# Altium PCB Board Assembly.PcbDoc (part 3 of 3)
Units mil, origin at the board's own origin, x right, y up, seen from the top; angles counter-clockwise.
Board outline 3645 x 2655 mil, 2 copper layers (Top Layer, Bottom Layer); 97 components, 111 nets, 464 pads, 100 vias.
Unrouted connection lines stored in the file: 11.
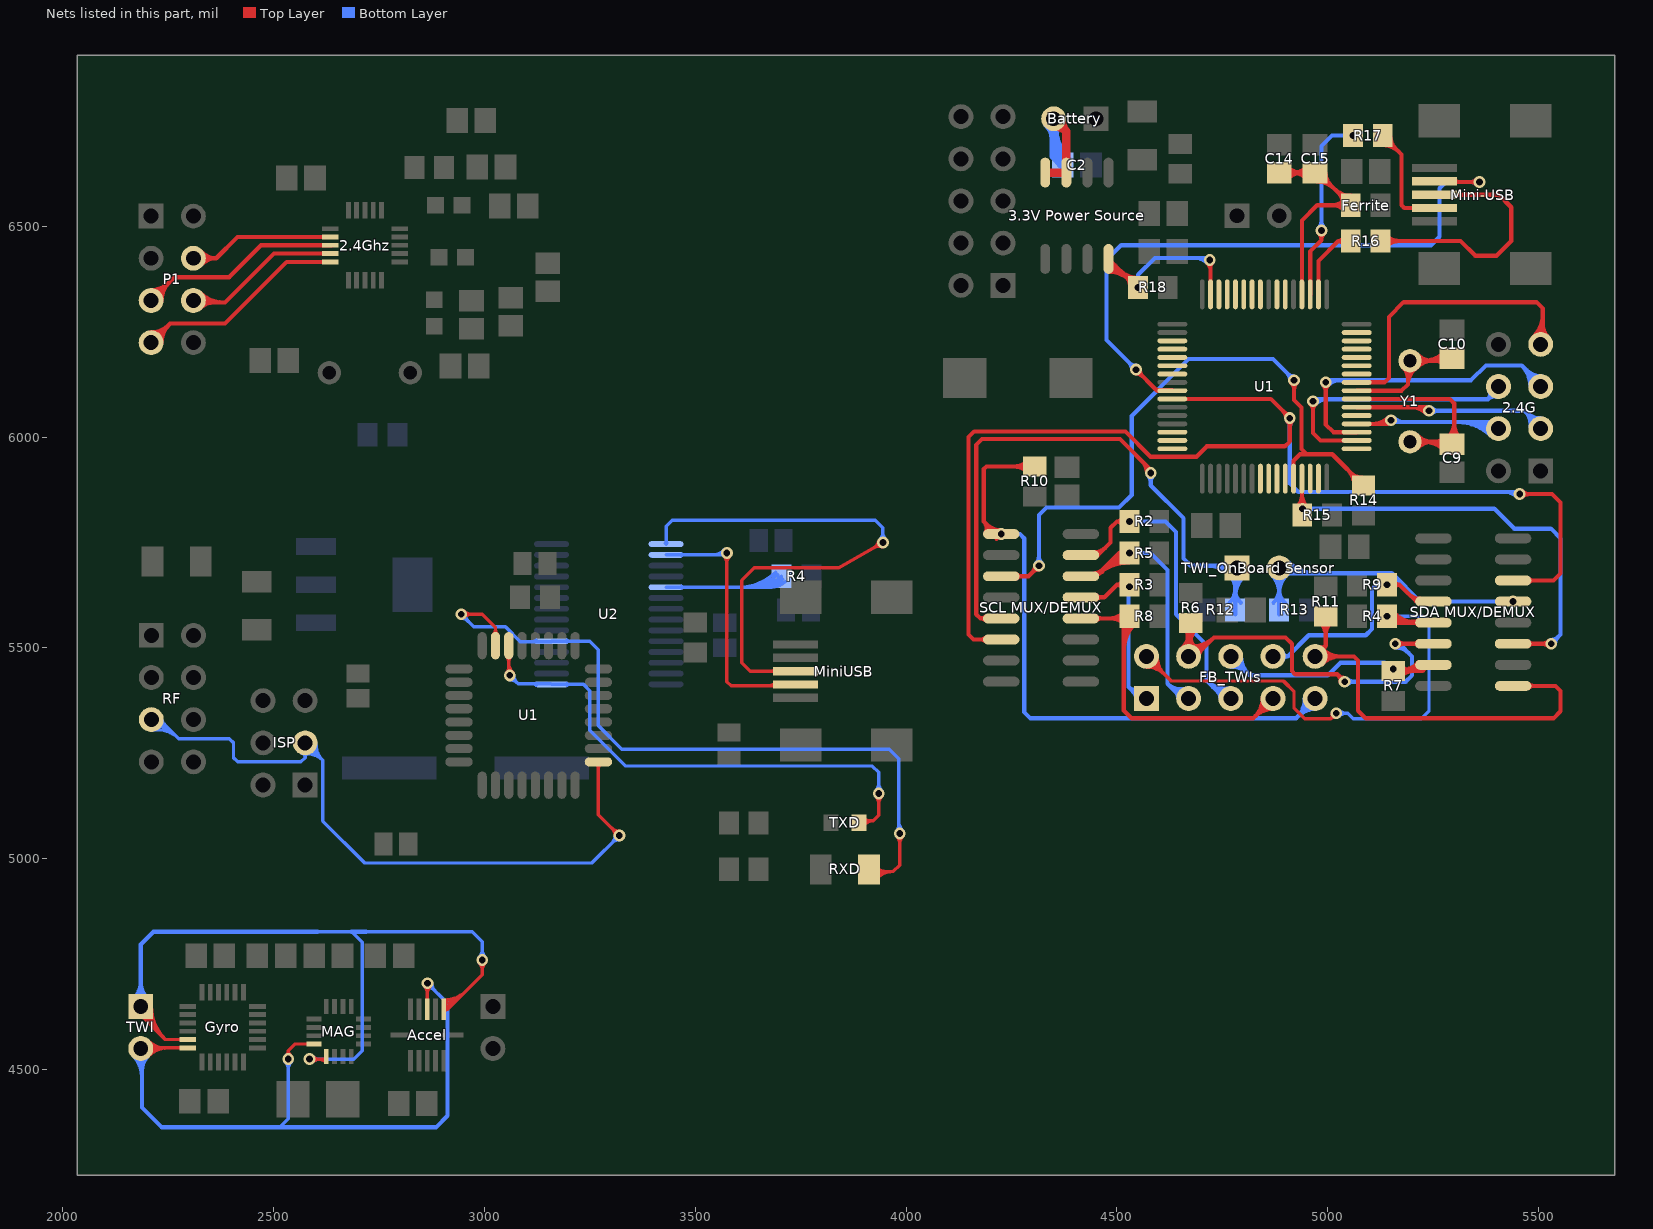
[diagram p3: the nets of this part, all layers, seen from the top]

## Via types
v1: diameter 28, hole 16, Top Layer to Bottom Layer, 96 vias
v2: diameter 59.06, hole 35.43, Top Layer to Bottom Layer, 4 vias

## Nets (pads, with @x,y where several pads share a name; then routed paths per layer and width w, separated by ;. In a path a pad name is that pad's centre, name@x,y a point inside that pad or via, vN(x,y) a via of type N, cw(c..) or ccw(c..) an arc to the next point about the centre after c; other vN are vias at no path point) (continued)
NetR4_2: R4.2@3704.57,5670 U2.19 | length 667.5
  Bottom Layer w8: U2.19@3430.83,5643.98 3678.54,5643.98 ; U2.19@3467.32,5641.93 cw(c3472.25,5637) 3472.25,5643.98 cw(c3472.25,5650.95) U2.19@3467.32,5646.02 ; 3603.87,5643.98 ccw(c3603.87,5766.76) R4.2@3690.69,5679.94 ; 3623.19,5643.98 ccw(c3623.19,5747.44) R4.2@3696.35,5674.28 ; 3642.5,5643.98 ccw(c3642.5,5728.13) R4.2@3702.01,5668.62 ; 3661.81,5643.98 ccw(c3661.81,5708.82) R4.2@3707.66,5662.97 ; R4.2@3681.13,5643.98 ccw(c3681.13,5689.5) R4.2@3713.32,5657.31 ; R4.2@3685.12,5663.44 cw(c3662.17,5660.35) 3678.54,5643.98 ; R4.2@3697.3,5647.84 ccw(c3690.85,5631.67) 3678.54,5643.98 ; R4.2@3704.57,5670 3678.54,5643.98
NetR16_2: R16.2 U1.50 | length 190.9
  Top Layer w10: U1.50@4977.95,6355 4977.95,6417.95 5025,6465 ; R16.2@5037.77,6456.96 ccw(c5025,6450.84) 5025,6465 ; R16.2@5037.77,6473.04 cw(c5025,6479.16) 5025,6465 ; R16.2@5054.57,6465 5025,6465
NetR17_2: R17.2 U1.51 | length 549.9
  Top Layer w10: U1.51@4958.27,6338.5 4958.27,6440 4985,6466.73 v1(4985,6490) ; v1@4978.64,6483.64 cw(c4963.27,6468.27) 4985,6468.27 cw(c5006.73,6468.27) v1@4991.36,6483.64
  Bottom Layer w10: v1@4978.64,6496.36 ccw(c4963.27,6511.73) 4985,6511.73 ccw(c5006.73,6511.73) v1@4991.36,6496.36 ; v1(4985,6490) 4985,6690 5010,6715 v1(5059.57,6715) ; v1@5053.2,6708.64 ccw(c5037.84,6693.27) 5037.84,6715 ccw(c5037.84,6736.73) v1@5053.2,6721.36
NetRXD_2: RXD.2 U1.31@3026.26,5505.35 U2.5 | length 2052.1
  Top Layer w8: v1(2945,5580) 2995,5580 3026.26,5548.74 U1.31@3026.26,5505.35 ; v1@2952.07,5572.93 cw(c2969.14,5555.86) 2969.14,5580 cw(c2969.14,5604.14) v1@2952.07,5587.07 ; U1.31@3021.43,5531.84 ccw(c3009.78,5543.49) 3026.26,5543.49 ccw(c3042.74,5543.49) U1.31@3031.09,5531.84 ; RXD.2@3922.35,4956.25 cw(c3952.47,4930.14) 3952.47,4970 ; RXD.2@3923.9,4975 3928.9,4970 3970,4970 ; RXD.2@3927.35,4980.42 ccw(c3952.52,5005.59) 3952.52,4970 ; RXD.2@3928.4,4951.01 cw(c3970,4914.94) 3970,4970 ; v1@3977.93,5052.93 cw(c3960.86,5035.86) 3985,5035.86 cw(c4009.14,5035.86) v1@3992.07,5052.93 ; v1(3985,5060) 3985,4985 3970,4970
  Bottom Layer w8: v1@2945,5570 cw(c2945,5545.86) 2962.07,5562.93 cw(c2979.14,5580) v1@2955,5580 ; v1(2945,5580) 2975,5550 3050,5550 3085,5515 3158.15,5515 U2.5@3159.17,5516.02 3250,5516.02 3270,5496.02 3270,5316.1 3326.1,5260 3960,5260 3982.5,5237.5 3982.5,5062.5 v1(3985,5060) ; 3115.28,5515 ccw(c3115.28,5525.47) U2.5@3122.68,5518.07 ; U2.5@3195.67,5513.98 cw(c3200.6,5509.05) 3200.6,5516.02 cw(c3200.6,5523) U2.5@3195.67,5518.07 ; v1@3977.93,5067.07 ccw(c3966.89,5078.11) 3982.5,5078.11 ; 3982.5,5090.18 ccw(c4015.18,5090.18) v1@3992.07,5067.07
NetTXD_2: TXD.2 U1.30@3057.76,5505.35 U2.1 | length 1493.6
  Top Layer w8: v1@3052.93,5442.07 ccw(c3041.28,5453.72) 3057.76,5453.72 ; U1.30@3052.93,5478.87 cw(c3041.27,5467.22) 3057.76,5467.22 cw(c3074.24,5467.22) U1.30@3062.58,5478.87 ; 3057.76,5464.56 ccw(c3089.56,5464.56) v1@3067.07,5442.07 ; U1.30@3057.76,5505.35 3057.76,5437.24 v1(3060,5435) ; TXD.2@3888.46,5085 3893.46,5090 3921.73,5090 ; TXD.2@3898.16,5096.67 ccw(c3914.26,5112.76) 3914.26,5090 ; TXD.2@3899.48,5078.8 cw(c3921.73,5062.3) 3921.73,5090 ; v1@3927.93,5147.93 cw(c3910.86,5130.86) 3935,5130.86 cw(c3959.14,5130.86) v1@3942.07,5147.93 ; v1(3935,5155) 3935,5103.27 3921.73,5090
  Bottom Layer w8: v1@3060,5425 cw(c3060,5400.86) 3077.07,5417.93 cw(c3094.14,5435) v1@3070,5435 ; v1(3060,5435) 3080,5415 3157.83,5415 U2.1@3159.17,5413.66 3235,5413.66 3250,5398.66 3250,5305 3335,5220 3920,5220 3935,5205 v1(3935,5155) ; 3114.52,5415 cw(c3114.52,5403.45) U2.1@3122.68,5411.62 ; U2.1@3195.67,5411.62 cw(c3200.6,5406.69) 3200.6,5413.66 cw(c3200.6,5420.64) U2.1@3195.67,5415.7 ; v1@3927.93,5162.07 ccw(c3910.86,5179.14) 3935,5179.14 ccw(c3959.14,5179.14) v1@3942.07,5162.07
PA0: U1.3@4631.5,6228.27
PA1: U1.4@4631.5,6208.58
PA2: U1.5@4631.5,6188.9
PA3: Mini-USB.4 U1.9@4631.5,6110.16 | length 1704.9
  Top Layer w10: v1@4545,6151 cw(c4545,6129.24) 4560.39,6144.63 ; v1(4545,6160) 4593.98,6111.03 ; v1@4554,6160 ccw(c4575.69,6160) 4560.35,6144.66 ; 4588.76,6116.26 ccw(c4601.77,6129.27) U1.9@4601.77,6110.87 ; U1.9@4601.32,6110.7 cw(c4597.83,6114.88) 4593.98,6111.03 ; U1.9@4631.5,6110.16 4630.62,6111.03 4593.98,6111.03 ; Mini-USB.4@5253.07,6606.5 5254.57,6605 v1(5360,6605) ; Mini-USB.4@5299.8,6609.92 ccw(c5311.68,6621.8) 5311.68,6605 ; v1@5353.64,6598.64 ccw(c5338.27,6583.27) 5338.27,6605 ccw(c5338.27,6626.73) v1@5353.64,6611.36
  Bottom Layer w10: v1@4536,6160 ccw(c4514.27,6160) 4529.64,6175.36 ccw(c4545,6190.73) v1@4545,6169 ; v1(4545,6160) 4475,6230 4475,6420 4510,6455 5245,6455 5265,6475 5265,6590 5280,6605 v1(5360,6605) ; v1@5353.64,6598.64 ccw(c5338.27,6583.27) 5338.27,6605 ccw(c5338.27,6626.73) v1@5353.64,6611.36
PA4: "SCL MUX/DEMUX.6" "SDA MUX/DEMUX.6" U1.10@4631.5,6090.47 | length 3032
  Top Layer w10: 4189.2,5515.18 ccw(c4177.57,5503.56) 4177.57,5520 ccw(c4177.57,5536.44) 4189.2,5524.82 ; 4225.51,5520 4160,5520 4148.1,5531.9 4148.1,6000 4161.42,6013.32 4520,6013.32 4579.76,5953.55 4688.55,5953.55 4713.1,5978.1 4898.1,5978.1 4910,5990 v1(4910,6045) 4910,6045.47 4865,6090.47 U1.10@4631.5,6090.47 ; 4894.3,6061.17 cw(c4878.13,6045) v1@4901,6045 ; 4895.44,6060.03 ccw(c4910,6074.59) v1@4910,6054 ; v1@4903.64,6038.64 cw(c4888.27,6023.27) 4910,6023.27 cw(c4931.73,6023.27) v1@4916.36,6038.64 ; 5439.49,5660 5535,5660 5551.9,5676.9 5551.9,5845 5531.9,5865 v1(5455,5865) ; v1@5461.36,5858.64 cw(c5476.73,5843.27) 5476.73,5865 cw(c5476.73,5886.73) v1@5461.36,5871.36 ; 5475.8,5655.18 cw(c5487.43,5643.56) 5487.43,5660 cw(c5487.43,5676.44) 5475.8,5664.82
  Bottom Layer w10: v1@4903.64,6038.64 cw(c4888.27,6023.27) 4910,6023.27 cw(c4931.73,6023.27) v1@4916.36,6038.64 ; v1(4910,6045) 4910,5890 4930,5870 5450,5870 v1(5455,5865) ; 5421.2,5870 cw(c5421.2,5831.2) v1@5448.64,5858.64
PA8: U1.14@4631.5,6011.73
PA9: "SCL MUX/DEMUX.3" R14.1 U1.28@4918.9,5901.5 | length 1798
  Top Layer w10: 4225.51,5670 4290,5670 v1(4315,5695) ; 4261.82,5665.18 cw(c4273.45,5653.56) 4273.45,5670 cw(c4273.45,5686.44) 4261.82,5674.82 ; v1@4306,5695 cw(c4284.27,5695) 4299.64,5679.64 cw(c4315,5664.27) v1@4315,5686 ; v1@4913.64,6128.64 cw(c4898.27,6113.27) 4920,6113.27 cw(c4941.73,6113.27) v1@4926.36,6128.64 ; U1.28@4918.9,5901.5 4918.9,5943.9 4934.45,5959.45 4950,5959.45 ; v1(4920,6135) 4920,6087.9 4937.9,6070 4937.9,5971.55 4950,5959.45 ; 5046.8,5923.2 cw(c5009.02,5885.43) R14.1@5062.44,5885.43 ; 5055.25,5914.75 ccw(c5081.06,5940.55) R14.1@5081.06,5904.05 ; R14.1@5063.87,5906.13 cw(c5043.17,5885.43) R14.1@5072.44,5885.43 ; R14.1@5085,5885.43 5084.57,5885.43 5010.55,5959.45 4950,5959.45
  Bottom Layer w10: v1@4308.64,5701.36 ccw(c4293.27,5716.73) 4315,5716.73 ccw(c4336.73,5716.73) v1@4321.36,5701.36 ; v1(4315,5695) 4315,5815 4332.9,5832.9 4505,5832.9 4535,5862.9 4535,6050 4670,6185 4870,6185 v1(4920,6135) ; v1@4911,6135 ccw(c4889.27,6135) 4904.64,6150.36 ccw(c4920,6165.73) v1@4920,6144
PA10: "SDA MUX/DEMUX.3" R15.1 U1.29@4938.58,5901.5 | length 1325.4
  Top Layer w10: R15.1@4926.4,5832.1 ccw(c4896.99,5861.52) 4938.58,5861.52 ; R15.1@4933.64,5836.36 ccw(c4921.69,5848.31) 4938.58,5848.31 ; R15.1@4935.04,5822.49 cw(c4930.71,5815.91) 4938.58,5815.91 cw(c4944.32,5815.91) R15.1@4942.64,5821.39 ; 4938.58,5855.15 ccw(c4965.15,5855.15) R15.1@4946.36,5836.36 ; U1.29@4938.58,5866.27 ccw(c4986.9,5866.27) R15.1@4952.73,5832.1 ; U1.29@4938.58,5901.5 4938.58,5815.98 R15.1@4939.57,5815 ; 5439.49,5510 v1(5530,5510) ; 5475.8,5505.18 cw(c5487.43,5493.56) 5487.43,5510 cw(c5487.43,5526.44) 5475.8,5514.82 ; v1@5523.64,5503.64 ccw(c5508.27,5488.27) 5508.27,5510 ccw(c5508.27,5531.73) v1@5523.64,5516.36
  Bottom Layer w10: v1(4940,5830) 5395,5830 5442.1,5782.9 5529,5782.9 5551.9,5760 5551.9,5531.9 v1(5530,5510) ; v1@4946.36,5823.64 cw(c4961.73,5808.27) 4961.73,5830 cw(c4961.73,5851.73) v1@4946.36,5836.36 ; v1@5530,5519 ccw(c5530,5540.73) 5545.36,5525.36 ccw(c5560.73,5510) v1@5539,5510
PA11: U1.30@4958.27,5901.5
PA12: U1.31@4977.95,5901.5
PA13: U1.33
PA14: 2.4G.6 U1.34 | length 750.6
  Top Layer w10: v1@4958.64,6078.64 cw(c4943.27,6063.27) 4965,6063.27 cw(c4986.73,6063.27) v1@4971.36,6078.64 ; v1(4965,6085) 4965,6010 4982.95,5992.05 U1.34@5068.5,5992.05
  Bottom Layer w10: v1(4965,6085) 4969.73,6089.73 5379.73,6089.73 ; v1@4971.36,6078.64 cw(c4998.14,6051.86) 4998.14,6089.73 ; 2.4G.6@5382.97,6109.21 cw(c5367.72,6101.74) 5379.73,6089.73 ; 2.4G.6@5400.22,6095.94 ccw(c5395.79,6073.67) 5379.73,6089.73 ; 2.4G.6@5405,6120 5405,6115 5379.73,6089.73
PA15: 2.4G.5 U1.35 | length 924.8
  Top Layer w10: v1@4988.64,6123.64 cw(c4973.27,6108.27) 4995,6108.27 cw(c5016.73,6108.27) v1@5001.36,6123.64 ; v1(4995,6130) 4995,6030 5013.27,6011.73 U1.35@5068.5,6011.73
  Bottom Layer w10: v1(4995,6130) 5000,6135 5340,6135 5375,6170 5460,6170 ; v1@5001.36,6123.64 cw(c5028.8,6096.2) 5028.8,6135 ; 5471.66,6158.34 ccw(c5505,6191.67) 2.4G.5@5505,6144.53 ; 5476.93,6153.07 cw(c5444.23,6120.37) 2.4G.5@5490.47,6120.09 ; 2.4G.5@5480.47,6120.15 ccw(c5410.58,6120.58) 5460,6170 ; 2.4G.5@5505,6120 5505,6125 5460,6170
PA16: 2.4G.4 U1.36 | length 646.1
  Top Layer w10: U1.36@5068.5,6031.42 5141.42,6031.42 v1(5150,6040) ; 5107.55,6031.42 ccw(c5107.55,6082.45) v1@5143.64,6046.36 ; 5131.69,6031.42 ccw(c5131.69,6058.31) v1@5150.71,6039.29
  Bottom Layer w10: v1(5150,6040) 5154.47,6035.53 5389.47,6035.53 2.4G.4@5405,6020 ; v1@5156.36,6046.36 ccw(c5182.53,6072.53) 5182.53,6035.53 ; 5308.3,6035.53 cw(c5308.3,5923.3) 2.4G.4@5387.66,6002.66 ; 5332.44,6035.53 cw(c5332.44,5947.44) 2.4G.4@5394.73,6009.73 ; 5356.58,6035.53 cw(c5356.58,5971.58) 2.4G.4@5401.8,6016.8
PA17: U1.37
PA18: C9.2@5295,5983.46 U1.39 Y1.2@5195,5988.94 | length 783.7
  Top Layer w10: U1.39@5068.5,6090.47 5179.53,6090.47 5289.53,6090.47 5300,6080 5300,5988.46 C9.2@5295,5983.46 5289.53,5988.94 Y1.2@5195,5988.94 ; Y1.2@5203.88,5980.06 cw(c5225.32,5958.62) 5225.32,5988.94 cw(c5225.32,6019.26) Y1.2@5203.88,5997.82 ; Y1.2@5210.95,5972.99 cw(c5249.46,5934.47) 5249.46,5988.94 cw(c5249.46,6043.4) Y1.2@5210.95,6004.89 ; 5228.14,5988.94 cw(c5228.14,5920.54) C9.2@5276.5,5968.9 ; 5252.28,5988.94 cw(c5252.28,5944.69) C9.2@5283.57,5975.98 ; 5254.56,5988.94 ccw(c5254.56,6019.96) C9.2@5276.5,5998.02 ; C9.2@5284.38,5998.02 ccw(c5246.66,6035.74) 5300,6035.74 ; C9.2@5291.45,5990.95 ccw(c5270.8,6011.6) 5300,6011.6 ; 5300,6030.61 ccw(c5346.08,6030.61) C9.2@5313.5,5998.02
PA19: C10.2 U1.40 Y1.1@5195,6181.06 | length 637.7
  Top Layer w10: U1.40@5068.5,6110.16 5175.16,6110.16 5190,6125 5190,6176.06 Y1.1@5195,6181.06 5289.53,6181.06 C10.2@5295,6186.54 ; Y1.1@5179.05,6165.11 cw(c5152.61,6138.67) 5190,6138.67 ; 5190,6124.78 cw(c5238.69,6124.78) Y1.1@5208.83,6163.24 ; 5190,6145.2 cw(c5222.84,6145.2) Y1.1@5202.7,6171.14 ; Y1.1@5203.88,6172.18 cw(c5225.32,6150.74) 5225.32,6181.06 cw(c5225.32,6211.38) Y1.1@5203.88,6189.94 ; Y1.1@5210.95,6165.11 cw(c5249.46,6126.6) 5249.46,6181.06 cw(c5249.46,6235.53) Y1.1@5210.95,6197.01 ; 5228.14,6181.06 ccw(c5228.14,6249.46) C10.2@5276.5,6201.1 ; 5252.28,6181.06 ccw(c5252.28,6225.31) C10.2@5283.57,6194.02 ; 5254.56,6181.06 cw(c5254.56,6150.04) C10.2@5276.5,6171.98
PA20: U1.44
PA21: U1.45
PA22: U1.46
PA23: U1.47
PA24: U1.59
PA25: U1.60
PA26: U1.61
PA27: U1.62
PA28: 2.4G.7 U1.41 | length 851
  Top Layer w10: U1.41@5068.5,6129.84 5134.84,6129.84 5145,6140 5145,6285 5180,6320 5495,6320 5510,6305 2.4G.7@5510,6240 ; 2.4G.7@5487.66,6237.34 ccw(c5433.71,6291.29) 5510,6291.29 ; 2.4G.7@5494.73,6230.27 ccw(c5457.86,6267.14) 5510,6267.14 ccw(c5552.14,6267.14) 2.4G.7@5522.34,6237.34 ; 2.4G.7@5505,6220 2.4G.7@5510,6240 ; 2.4G.7@5510,6220 2.4G.7@5510,6240
PA29: U1.42
PA30: U1.15@4631.5,5992.05
PA31: U1.16@4631.5,5972.36
PB0: U1.6@4631.5,6169.21
PB1: U1.7@4631.5,6149.53
PB2: U1.24@4840.16,5901.5
PB3: U1.25@4859.84,5901.5
PB4: U1.26@4879.53,5901.5
PB5: U1.27@4899.21,5901.5
PB6: 2.4G.3 U1.38 | length 662.5
  Top Layer w10: U1.38@5068.5,6070.79 5231.84,6070.79 v1(5240,6062.63) ; 5198.57,6070.79 cw(c5198.57,6021.2) v1@5233.64,6056.26 ; 5222.71,6070.79 cw(c5222.71,6045.34) v1@5240.71,6063.33
  Bottom Layer w10: v1(5240,6062.63) 5467.37,6062.63 ; v1@5246.36,6056.26 cw(c5261.73,6040.9) 5261.73,6062.63 cw(c5261.73,6084.36) v1@5246.36,6068.99 ; 5471.66,6058.34 ccw(c5505,6091.67) 2.4G.3@5505,6044.53 ; 2.4G.3@5480.69,6023.26 ccw(c5434.23,6029.48) 5467.37,6062.63 ; 5481.67,6048.33 cw(c5459.45,6026.1) 2.4G.3@5490.6,6021.93 ; 2.4G.3@5505,6020 5505,6025 5467.37,6062.63
PB7: U1.43
PB8: U1.54
PB9: U1.55
PB10: U1.57
PB11: U1.58
RESET_N: "3.3V Power Source.8" R18.1 U1.63 | length 773.7
  Top Layer w10: 4480,6392.2 cw(c4480,6318.73) R18.1@4531.95,6370.69 ; 4480,6402.2 cw(c4480,6352.88) 4514.88,6387.76 ; 4480,6412.2 cw(c4480,6387.02) 4497.81,6404.83 ; 4480,6422.2 cw(c4480,6421.16) 4480.74,6421.9 ; 4480,6422.64 4547.64,6355 R18.1@4549.57,6355 ; 4507.76,6394.87 ccw(c4549.57,6436.68) R18.1@4549.57,6377.56 ; 4521.93,6380.71 cw(c4500.15,6358.94) R18.1@4530.94,6358.94 ; 4524.83,6377.8 ccw(c4549.57,6402.54) R18.1@4549.57,6367.56 ; R18.1@4530.6,6372.03 ccw(c4550,6391.43) R18.1@4550,6364 ; R18.1@4531.54,6372.39 cw(c4524,6344.25) R18.1@4550.92,6355.38 ; R18.1@4536.31,6366.33 cw(c4524.97,6355) R18.1@4541,6355 ; v1@4713.64,6413.64 cw(c4693.33,6393.33) 4722.05,6393.33 ; v1(4720,6420) 4722.05,6417.95 U1.63@4722.05,6338.5 ; 4722.05,6403.21 cw(c4736.79,6403.21) v1@4726.36,6413.64
  Top Layer w20: R18.1@4549.57,6355 v1(4550,6355)
  Bottom Layer w10: v1@4543.64,6361.36 ccw(c4528.27,6376.73) 4550,6376.73 ccw(c4571.73,6376.73) v1@4556.36,6361.36 ; v1(4550,6355) 4550,6385 4590,6425 4715,6425 v1(4720,6420) ; 4686.2,6425 cw(c4686.2,6386.2) v1@4713.64,6413.64
SCK: ISP.3 RF.5 U1.17@3270.35,5229.76 | length 2130.1
  Top Layer w8: U1.17@3265.53,5224.94 cw(c3253.87,5213.28) 3270.35,5213.28 cw(c3286.84,5213.28) U1.17@3275.18,5224.94 ; U1.17@3270.35,5229.76 3270.35,5104.65 v1(3320,5055) ; v1@3310,5055 ccw(c3285.86,5055) 3302.93,5072.07 ccw(c3320,5089.14) v1@3320,5065
  Bottom Layer w8: RF.5@2210,5330 2230,5330 2275,5285 ; RF.5@2210.24,5328.49 cw(c2215.97,5292.52) 2241.72,5318.28 ; RF.5@2211.5,5320.59 cw(c2219.01,5273.38) 2252.82,5307.18 ; RF.5@2212.76,5312.69 cw(c2222.06,5254.25) 2263.91,5296.09 ; RF.5@2214.01,5304.79 cw(c2225.11,5235.11) 2275,5285 ; RF.5@2235.53,5330 ccw(c2248.87,5330) 2239.44,5320.56 ; ISP.3@2567.2,5250.69 cw(c2563.77,5240) 2575,5240 ; ISP.3@2575.58,5257.48 cw(c2576.82,5219.66) 2603.58,5246.42 cw(c2630.34,5273.18) ISP.3@2592.52,5274.42 ; ISP.3@2575.84,5249.49 cw(c2577.66,5194.4) 2616.63,5233.37 ; ISP.3@2582.8,5250.69 ccw(c2586.23,5240) 2575,5240 ; ISP.3@2600.51,5274.16 ccw(c2655.6,5272.34) 2616.63,5233.37 ; v1@3310,5055 cw(c3285.86,5055) 3302.93,5037.93 cw(c3320,5020.86) v1@3320,5045 ; v1(3320,5055) 3255,4990 2716.1,4990 2616.63,5089.47 2616.63,5233.37 ; 2275,5285 2395,5285 2405,5275 2405,5240 2415,5230 2565,5230 2575,5240 ; 2575,5240 ISP.3@2575,5275 2616.63,5233.37
SPI0: 2.4Ghz.2 P1.4 | length 478.6
  Top Layer w10: P1.4@2309.69,6424.11 2364.03,6424.11 ; P1.4@2320.59,6414.5 cw(c2341.87,6395.73) 2341.87,6424.11 cw(c2341.87,6452.49) P1.4@2320.59,6433.72 ; P1.4@2328.09,6407.89 cw(c2364.02,6376.2) 2364.02,6424.11 ; P1.4@2328.09,6440.33 ccw(c2364.02,6472.02) 2364.02,6424.11 ; 2.4Ghz.2@2637.98,6474.55 2414.46,6474.55 2364.03,6424.11
SPI1: 2.4Ghz.3 P1.5 | length 630.6
  Top Layer w10: P1.5@2209.69,6324.11 2264.69,6379.11 2394.69,6379.11 2470.44,6454.86 2.4Ghz.3@2637.98,6454.86 ; P1.5@2209.69,6338.64 ccw(c2209.69,6373.71) 2234.49,6348.91 ccw(c2259.29,6324.11) P1.5@2224.22,6324.11 ; P1.5@2209.69,6348.64 ccw(c2209.69,6407.85) 2251.56,6365.98 ccw(c2293.43,6324.11) P1.5@2234.22,6324.11
SPI2: 2.4Ghz.4 P1.6 | length 512.4
  Top Layer w10: P1.6@2309.69,6324.11 2314.69,6319.11 2384.69,6319.11 2500.76,6435.18 2.4Ghz.4@2637.98,6435.18 ; P1.6@2319.96,6334.38 ccw(c2356.83,6371.25) 2356.83,6319.11 ccw(c2356.83,6276.97) P1.6@2327.03,6306.77 ; P1.6@2327.03,6341.45 ccw(c2380.98,6395.4) 2380.98,6319.11
SPI3: 2.4Ghz.5 P1.7 | length 655.7
  Top Layer w10: P1.7@2209.69,6224.11 2254.69,6269.11 2384.69,6269.11 2531.07,6415.49 2.4Ghz.5@2637.98,6415.49 ; P1.7@2209.69,6238.64 ccw(c2209.69,6273.71) 2234.49,6248.91 ccw(c2259.29,6224.11) P1.7@2224.22,6224.11 ; P1.7@2209.69,6248.64 ccw(c2209.69,6307.85) 2251.56,6265.98 ccw(c2293.43,6224.11) P1.7@2234.22,6224.11
TWI0: Accel.7 Gyro.23 MAG.1 TWI.1 | length 2534.7
  Top Layer w8: TWI.1@2185,4624.47 cw(c2185,4611.13) TWI.1@2194.44,4620.56 ; TWI.1@2185,4650 2185,4630 2243.66,4571.34 Gyro.23@2296.54,4571.34 ; TWI.1@2186.53,4650 ccw(c2238.5,4650) 2201.75,4613.25 ; TWI.1@2194.53,4650 ccw(c2265.81,4650) 2215.41,4599.59 ; TWI.1@2202.53,4650 ccw(c2293.13,4650) 2229.06,4585.94 ; TWI.1@2210.53,4650 ccw(c2320.44,4650) 2242.72,4572.28 ; v1(2585,4525) 2618.86,4525 MAG.1@2625,4531.14 ; v1@2592.07,4517.93 cw(c2609.14,4500.86) 2609.14,4525 cw(c2609.14,4549.14) v1@2592.07,4532.07 ; 2606.71,4525 cw(c2606.71,4500.85) MAG.1@2623.79,4517.93 ; Accel.7@2903.74,4640.86 ccw(c2903.74,4658.04) 2915.89,4645.89 ; Accel.7@2903.74,4643.27 2913.27,4643.27 2995,4725 v1(2995,4760) ; Accel.7@2903.74,4648.86 ccw(c2903.74,4685.36) 2929.55,4659.55 ; Accel.7@2903.74,4656.86 ccw(c2903.74,4712.67) 2943.21,4673.21 ; Accel.7@2903.74,4664.86 ccw(c2903.74,4739.98) 2956.86,4686.86 ; v1@2987.93,4752.93 cw(c2970.86,4735.86) 2995,4735.86 cw(c3019.14,4735.86) v1@3002.07,4752.93
  Bottom Layer w8: v1(2585,4525) 2690,4525 2710,4545 2710,4801.9 2685,4826.9 2605,4826.9 ; v1@2592.07,4517.93 cw(c2609.14,4500.86) 2609.14,4525 cw(c2609.14,4549.14) v1@2592.07,4532.07 ; 2720,4826.9 2971,4826.9 2995,4802.9 v1(2995,4760) ; v1@2987.93,4767.07 ccw(c2970.86,4784.14) 2995,4784.14 ccw(c3019.14,4784.14) v1@3002.07,4767.07
  Bottom Layer w10: TWI.1@2167.66,4667.34 ccw(c2125.79,4709.21) 2185,4709.21 ccw(c2244.21,4709.21) TWI.1@2202.34,4667.34 ; TWI.1@2174.73,4660.27 ccw(c2149.93,4685.07) 2185,4685.07 ccw(c2220.07,4685.07) TWI.1@2195.27,4660.27 ; TWI.1@2185,4650 2185,4796.9 2215,4826.9 2605,4826.9 ; 2685,4826.9 2720,4826.9
TWI0_0: "SCL MUX/DEMUX.13" FB_TWIs.1 R3.2@4529.57,5650 | length 619.4
  Top Layer w10: 4414.49,5620 4470,5620 4500,5650 ; 4450.8,5615.18 cw(c4462.43,5603.56) 4462.43,5620 cw(c4462.43,5636.44) 4450.8,5624.82 ; R3.2@4512.77,5641.96 ccw(c4500,5635.84) 4500,5650 ; R3.2@4512.77,5658.04 cw(c4500,5664.16) 4500,5650 ; R3.2@4523.1,5639.22 ccw(c4500,5619.86) 4500,5650 ; R3.2@4529.57,5650 4500,5650
  Bottom Layer w10: v1@4523.64,5638.64 cw(c4514.62,5629.62) 4527.37,5629.62 ; 4527.37,5616.93 cw(c4558.07,5616.93) v1@4536.36,5638.64 ; v1(4530,5645) 4527.37,5642.37 4527.37,5407.63 ; 4537.37,5397.63 ccw(c4553.75,5414.01) FB_TWIs.1@4563.74,5393.11 ; 4538.74,5396.26 cw(c4522.47,5380) FB_TWIs.1@4545.47,5380 ; FB_TWIs.1@4559.42,5402.13 cw(c4547.28,5427.54) 4527.37,5407.63 ; FB_TWIs.1@4570,5380 4555,5380 4527.37,5407.63
TWI0_1: "SDA MUX/DEMUX.13" FB_TWIs.2 R4.2@5140.43,5575 | length 1813.1
  Top Layer w8: FB_TWIs.2@4570,5454.47 cw(c4570,5392.84) 4613.58,5436.42 cw(c4657.16,5480) FB_TWIs.2@4595.53,5480 ; FB_TWIs.2@4570,5462.47 cw(c4570,5420.16) 4599.92,5450.08 cw(c4629.84,5480) FB_TWIs.2@4587.53,5480 ; FB_TWIs.2@4570,5480 4628.37,5421.63 4895,5421.63 4920,5396.63 4920,5357.1 4945,5332.1 5007.1,5332.1 ; v1@5010.24,5342.84 cw(c4998.87,5340.33) 5007.1,5332.1 ; v1@5017.84,5335.24 ccw(c5015.33,5323.87) 5007.1,5332.1 ; v1(5020,5345) 5007.1,5332.1
  Top Layer w10: R4.2@5133.13,5583.23 cw(c5143.98,5571) R4.2@5153.16,5584.53 ; R4.2@5139.46,5570.09 ccw(c5163.81,5594.44) R4.2@5163.81,5560 ; R4.2@5139.77,5575.75 cw(c5152.79,5561.08) R4.2@5163.8,5577.31 ; v1(5140.43,5575) R4.2@5155.43,5560 ; R4.2@5140.59,5566 cw(c5140.94,5545.51) R4.2@5155.43,5560 ; R4.2@5143.13,5566.41 cw(c5153.32,5533.95) 5170.33,5563.42 ; R4.2@5146.41,5568.27 cw(c5161.6,5551.16) 5174.44,5570.1 ; R4.2@5146.53,5577.16 ccw(c5187.96,5618.59) 5187.96,5560 ; R4.2@5149.42,5574.44 ccw(c5165.15,5573.46) R4.2@5157.27,5559.81 ; R4.2@5149.43,5574.85 ccw(c5169.93,5574.5) R4.2@5155.43,5560 ; R4.2@5153.6,5584.23 ccw(c5212.1,5642.73) 5212.1,5560 ; 5199.19,5562.78 ccw(c5203.71,5583.73) 5215.32,5565.72 ; 5206.08,5561.3 cw(c5203.66,5550.09) 5213.29,5556.31 ; 5214.2,5555.18 ccw(c5202.57,5543.56) 5202.57,5560 ccw(c5202.57,5576.44) 5214.2,5564.82 ; 5250.51,5560 R4.2@5155.43,5560
  Bottom Layer w8: v1(5020,5345) 5047.1,5345 5060,5332.1 5222.1,5332.1 5240,5350 5240,5560 5225,5575 v1(5140.43,5575) ; v1@5027.07,5337.93 cw(c5044.14,5320.86) 5044.14,5345 cw(c5044.14,5369.14) v1@5027.07,5352.07 ; v1@5147.5,5567.93 cw(c5164.57,5550.86) 5164.57,5575 cw(c5164.58,5599.14) v1@5147.5,5582.07
TWI1: Accel.9 Gyro.24 MAG.16 TWI.2 | length 2103.6
  Top Layer w8: TWI.2@2185,4550 2186.65,4551.65 Gyro.24@2296.54,4551.65 ; TWI.2@2197.39,4537.61 cw(c2231.31,4503.69) 2231.31,4551.65 ; TWI.2@2197.39,4562.39 ccw(c2223.32,4588.32) 2223.32,4551.65 ; TWI.2@2203.05,4531.95 cw(c2250.62,4484.38) 2250.62,4551.65 ; TWI.2@2203.05,4568.05 ccw(c2242.64,4607.64) 2242.64,4551.65 ; v1@2529,4533 ccw(c2520,4545) 2535,4545 ; v1(2535,4525) 2535,4545 ; v1@2541,4533 cw(c2550,4545) 2535,4545 ; MAG.16@2595.47,4560.67 2550.67,4560.67 2535,4545 ; v1@2857.93,4697.93 cw(c2842.38,4682.38) 2864.37,4682.38 ; v1@2859.37,4699.37 v1(2865,4705) 2864.37,4704.37 Accel.9@2864.37,4643.27 ; 2864.37,4679.34 cw(c2890.66,4679.34) v1@2872.07,4697.93
  Bottom Layer w8: 2515,4363.1 2535,4383.1 v1(2535,4525) ; v1@2527.93,4517.93 cw(c2510.86,4500.86) 2535,4500.86 cw(c2559.14,4500.86) v1@2542.07,4517.93 ; v1@2865,4695 cw(c2865,4670.86) 2882.07,4687.93 cw(c2899.14,4705) v1@2875,4705 ; v1(2865,4705) 2912.5,4657.5
  Bottom Layer w10: TWI.2@2167.66,4532.66 cw(c2118.3,4483.3) 2188.1,4483.3 ; TWI.2@2174.73,4539.73 cw(c2142.44,4507.44) 2188.1,4507.44 ; TWI.2@2185,4550 2188.1,4546.9 2188.1,4410 2235,4363.1 2515,4363.1 2885,4363.1 2912.5,4390.6 2912.5,4657.5 ; 2188.1,4498.27 cw(c2236.73,4498.27) TWI.2@2202.34,4532.66
TWI1_0: "SCL MUX/DEMUX.14" FB_TWIs.3 R5.2 | length 1162.3
  Top Layer w10: 4414.49,5670 4450,5670 ; 4445.98,5676.81 ccw(c4445.98,5702.95) 4464.47,5684.47 ; 4447.23,5676.7 ccw(c4451.66,5700.49) 4465.35,5680.53 ; 4466.85,5686.85 cw(c4528.65,5625.04) R5.2@4529.48,5712.44 ; 4482.94,5700.82 ccw(c4467.62,5762.2) R5.2@4521.85,5729.63 ; 4483.69,5703.69 cw(c4528.97,5658.41) R5.2@4529.58,5722.44 ; 4500.53,5720.53 cw(c4529.29,5691.78) R5.2@4529.68,5732.44 ; 4503.34,5715.68 ccw(c4495.81,5744.92) R5.2@4521.82,5729.57 ; R5.2@4506.36,5706.67 ccw(c4496.89,5744.62) R5.2@4530.42,5724.49 ; R5.2@4511.64,5719.97 ccw(c4505,5718.11) 4505,5725 ; R5.2@4511.64,5730.03 cw(c4505,5731.89) 4505,5725 ; R5.2@4514.95,5718.67 cw(c4518.25,5705.83) R5.2@4524.99,5717.25 ; R5.2@4523.2,5718.64 ccw(c4507.84,5703.27) 4507.84,5725 ccw(c4507.84,5746.73) R5.2@4523.2,5731.36 ; R5.2@4529.39,5702.44 ccw(c4528.33,5591.68) 4450,5670 ; v1(4529.57,5725) 4505,5725 ; 4450,5670 4505,5725
  Bottom Layer w10: v1(4529.57,5725) 4580,5725 4620,5685 4620,5415 ; v1@4535.93,5718.64 cw(c4551.29,5703.27) 4551.29,5725 cw(c4551.29,5746.73) v1@4535.93,5731.36 ; 4632.1,5402.9 ccw(c4656.72,5427.52) FB_TWIs.3@4666.09,5393.99 ; 4638.74,5396.26 cw(c4622.47,5380) FB_TWIs.3@4645.47,5380 ; FB_TWIs.3@4663.4,5403.62 cw(c4651.43,5446.43) 4620,5415 ; FB_TWIs.3@4670,5380 4655,5380 4620,5415
TWI1_1: "SDA MUX/DEMUX.14" FB_TWIs.4 R6.2 | length 1497.2
  Top Layer w10: FB_TWIs.4@4652.66,5497.34 ccw(c4598.71,5551.29) R6.2@4675,5551.29 ; FB_TWIs.4@4659.73,5490.27 ccw(c4622.86,5527.14) 4675,5527.14 ccw(c4717.14,5527.14) FB_TWIs.4@4687.34,5497.34 ; R6.2@4659.95,5544.62 cw(c4647.85,5528.34) 4667.45,5523.09 ; R6.2@4661.83,5546.4 cw(c4630.04,5514.61) 4675,5514.61 cw(c4719.96,5514.61) R6.2@4688.17,5546.4 ; 4668.89,5528.47 cw(c4692.7,5522.09) R6.2@4680.37,5543.44 ; FB_TWIs.4@4670.45,5484.51 ccw(c4674.07,5521.16) 4700.11,5495.11 ; FB_TWIs.4@4671.43,5494.46 ccw(c4676.76,5548.35) 4715.06,5510.06 ; FB_TWIs.4@4672.41,5504.41 ccw(c4679.45,5575.54) 4730,5525 ; R6.2@4675,5559.57 4675,5485 FB_TWIs.4@4670,5480 4685,5480 4730,5525 ; FB_TWIs.4@4694.53,5480 cw(c4717.53,5480) 4701.26,5496.26 ; v1@5031,5420 ccw(c5009.27,5420) 5024.64,5435.36 ccw(c5040,5450.73) v1@5040,5429 ; v1(5040,5420) 5022.63,5437.37 4922.63,5437.37 4915,5445 4915,5510 4900,5525 4730,5525 ; v1(5160,5510) 5250.51,5510 ; v1@5166.36,5503.64 cw(c5181.73,5488.27) 5181.73,5510 cw(c5181.73,5531.73) v1@5166.36,5516.36 ; 5214.2,5505.18 ccw(c5202.57,5493.56) 5202.57,5510 ccw(c5202.57,5526.44) 5214.2,5514.82
  Bottom Layer w10: v1(5040,5420) 5185,5420 5200,5435 5200,5480 5170,5510 v1(5160,5510) ; v1@5046.36,5413.64 cw(c5061.73,5398.27) 5061.73,5420 cw(c5061.73,5441.73) v1@5046.36,5426.36 ; v1@5160,5501 cw(c5160,5455.13) 5192.44,5487.56 ; v1@5160,5511 cw(c5160,5489.27) 5175.36,5504.64
TWI2_0: "SCL MUX/DEMUX.15" FB_TWIs.5 R2.2@4529.57,5800 | length 1029.9
  Top Layer w10: 4414.49,5720 4455,5720 4485,5750 4485,5785 4500,5800 ; 4445.98,5726.81 ccw(c4445.98,5765.02) 4473,5738 ; R2.2@4512.77,5791.96 ccw(c4500,5785.84) 4500,5800 ; R2.2@4512.77,5808.04 cw(c4500,5814.16) 4500,5800 ; R2.2@4523.64,5793.64 ccw(c4508.27,5778.27) 4508.27,5800 ccw(c4508.27,5821.73) R2.2@4523.64,5806.36 ; R2.2@4529.57,5800 4500,5800
  Bottom Layer w10: v1(4530,5800) 4615,5800 4640,5775 4640,5579.86 4712.63,5507.23 4712.63,5422.37 ; v1@4536.36,5793.64 cw(c4551.73,5778.27) 4551.73,5800 cw(c4551.73,5821.73) v1@4536.36,5806.36 ; 4726.82,5408.18 ccw(c4761.24,5442.6) FB_TWIs.5@4767.99,5394.39 ; 4738.74,5396.26 cw(c4722.47,5380) FB_TWIs.5@4745.47,5380 ; 4741.02,5393.98 ccw(c4764.73,5417.69) FB_TWIs.5@4769.37,5384.48 ; FB_TWIs.5@4766.6,5404.29 cw(c4757.76,5467.5) 4712.63,5422.37 ; FB_TWIs.5@4770,5380 4755,5380 4712.63,5422.37
TWI2_1: "SDA MUX/DEMUX.15" FB_TWIs.6 R7.2 | length 919
  Top Layer w10: R7.2@5155,5445.43 5225,5445.43 5240,5460.43 5250.08,5460.43 5250.51,5460 ; R7.2@5161.36,5456.36 ccw(c5187.75,5482.75) 5187.75,5445.43 ; R7.2@5161.49,5456.23 ccw(c5178.67,5472.73) 5184.36,5449.6 ; R7.2@5167.4,5445.43 ccw(c5167.4,5511.61) 5214.2,5464.82 ; R7.2@5172.1,5432.27 cw(c5203.89,5400.48) 5203.89,5445.43 cw(c5203.89,5490.39) R7.2@5172.1,5458.6 ; 5191.55,5445.43 ccw(c5191.55,5487.47) 5221.27,5457.75 ; 5215.69,5445.43 ccw(c5215.69,5463.33) 5228.34,5450.67
  Bottom Layer w10: FB_TWIs.6@4770,5455.47 cw(c4770,5396.26) 4811.87,5438.13 cw(c4853.74,5480) FB_TWIs.6@4794.53,5480 ; FB_TWIs.6@4770,5465.47 cw(c4770,5430.4) 4794.8,5455.2 cw(c4819.6,5480) FB_TWIs.6@4784.53,5480 ; FB_TWIs.6@4770,5480 4815,5435 5000,5435 5030,5465 5134.72,5465 ; v1@5153.58,5458.89 cw(c5150.13,5480.42) 5134.72,5465 ; v1(5155,5450) 5152.36,5447.36 5134.72,5465
TWI3_0: "SCL MUX/DEMUX.12" FB_TWIs.7 R8.2 | length 1120.9
  Top Layer w10: 4414.49,5570 R8.2@4524.57,5570 ; 4450.8,5565.18 cw(c4462.43,5553.56) 4462.43,5570 cw(c4462.43,5586.44) 4450.8,5574.82 ; 4482.04,5570 ccw(c4482.04,5618.59) R8.2@4516.4,5584.23 ; 4487.18,5570 cw(c4487.18,5528.67) R8.2@4516.4,5557.9 ; 4516.2,5493.83 cw(c4606.79,5493.83) R8.2@4542.73,5557.9 ; 4516.2,5517.98 cw(c4582.65,5517.98) R8.2@4535.66,5564.97 ; 4516.2,5542.12 cw(c4558.51,5542.12) R8.2@4528.59,5572.04 ; R8.2@4529.57,5575 R8.2@4524.57,5570 ; FB_TWIs.7@4845.47,5380 cw(c4786.26,5380) 4828.13,5338.13 cw(c4870,5296.26) FB_TWIs.7@4870,5355.47 ; FB_TWIs.7@4855.47,5380 cw(c4820.4,5380) 4845.2,5355.2 cw(c4870,5330.4) FB_TWIs.7@4870,5365.47 ; FB_TWIs.7@4870,5380 4823.1,5333.1 4535,5333.1 4516.2,5351.9 4516.2,5561.63 R8.2@4524.57,5570
TWI3_1: "SDA MUX/DEMUX.12" FB_TWIs.8 R9.2 | length 684.3
  Top Layer w10: v1(5140.43,5650) 5170,5650 ; R9.2@5146.8,5643.64 cw(c5162.16,5628.27) 5162.16,5650 cw(c5162.16,5671.73) R9.2@5146.8,5656.36 ; R9.2@5157.23,5641.96 cw(c5170,5635.84) 5170,5650 ; R9.2@5157.23,5658.04 ccw(c5170,5664.16) 5170,5650 ; 5192,5628 ccw(c5219.02,5655.02) 5219.02,5616.81 ; 5250.51,5610 5210,5610 5170,5650
  Bottom Layer w10: FB_TWIs.8@4870,5480 4905,5480 ; FB_TWIs.8@4893.06,5471.63 cw(c4905,5467.29) 4905,5480 ; FB_TWIs.8@4893.06,5488.37 ccw(c4905,5492.71) 4905,5480 ; v1@5134.07,5643.64 ccw(c5118.71,5628.27) 5118.71,5650 ccw(c5118.71,5671.73) v1@5134.07,5656.36 ; v1(5140.43,5650) 5115,5650 5105,5640 5105,5545 5090,5530 4955,5530 4905,5480
TWI4_0: "SCL MUX/DEMUX.1" FB_TWIs.9 R10.2 | length 1885.2
  Top Layer w10: 4188.06,5773.3 ccw(c4168.46,5784.16) 4184.3,5800 ; 4191.01,5793.29 ccw(c4225.51,5827.8) v1@4225.51,5779 ; 4193.69,5790.61 cw(c4180.54,5777.46) 4196.81,5768.45 ; 4203.07,5781.23 cw(c4192.62,5770.77) 4205.55,5763.61 ; 4208.08,5776.22 ccw(c4225.51,5793.65) v1@4225.51,5769 ; v1@4212.46,5771.84 cw(c4204.7,5764.08) 4214.3,5758.76 ; v1(4225.51,5770) 4214.3,5770 4184.3,5800 ; R10.2@4287.9,5917.27 ccw(c4256.11,5885.48) 4256.11,5930.43 ccw(c4256.11,5975.39) R10.2@4287.9,5943.6 ; R10.2@4305,5930.43 4190.43,5930.43 4184.3,5924.3 4184.3,5800
  Bottom Layer w10: v1(4225.51,5770) 4270,5770 4280,5760 4280,5348.1 4295,5333.1 4925,5333.1 4970,5378.1 FB_TWIs.9@4970,5380 ; v1@4231.88,5763.64 cw(c4247.24,5748.27) 4247.24,5770 cw(c4247.24,5791.73) v1@4231.88,5776.36 ; 4926.79,5334.89 ccw(c4881.67,5380) FB_TWIs.9@4945.47,5380 ; 4931.37,5339.47 cw(c4970,5300.84) FB_TWIs.9@4970,5355.47 ; 4943.86,5351.96 ccw(c4915.81,5380) FB_TWIs.9@4955.47,5380 ; 4948.44,5356.54 cw(c4970,5334.99) FB_TWIs.9@4970,5365.47
TWI4_1: "SDA MUX/DEMUX.1" FB_TWIs.10 R11.2 | length 1266.3
  Top Layer w10: FB_TWIs.10@4980.17,5502.32 ccw(c4985.65,5514.34) 4995,5505 ; FB_TWIs.10@4980.27,5469.73 cw(c5005.07,5444.93) 5005.07,5480 cw(c5005.07,5515.07) FB_TWIs.10@4980.27,5490.27 ; R11.2@4981.83,5561.4 cw(c4950.04,5529.61) 4995,5529.61 cw(c5039.96,5529.61) R11.2@5008.17,5561.4 ; FB_TWIs.10@4987.34,5462.66 cw(c5029.21,5420.79) 5029.21,5480 cw(c5029.21,5539.21) FB_TWIs.10@4987.34,5497.34 ; FB_TWIs.10@4992.32,5490.17 cw(c5004.34,5495.65) 4995,5505 ; R11.2@4995,5574.57 4995,5505 ; 5439.49,5410 5540,5410 5551.9,5398.1 5551.9,5350 5535,5333.1 5090,5333.1 5071.9,5351.2 5071.9,5470 5061.9,5480 FB_TWIs.10@4970,5480 4995,5505 ; 5475.8,5405.18 cw(c5487.43,5393.56) 5487.43,5410 cw(c5487.43,5426.44) 5475.8,5414.82
TWI5_0: "SCL MUX/DEMUX.5" "TWI_OnBoard Sensor.1" R12.2 | length 1831.7
  Top Layer w10: 4189.2,5565.18 ccw(c4177.57,5553.56) 4177.57,5570 ccw(c4177.57,5586.44) 4189.2,5574.82 ; 4225.51,5570 4176.2,5570 4166.2,5580 4166.2,5981.42 4180,5995.22 4507.45,5995.22 4580,5922.67 v1(4580,5915) ; 4559.21,5943.45 cw(c4530.76,5915) v1@4571,5915
  Bottom Layer w10: v1@4573.64,5908.64 cw(c4558.27,5893.27) 4580,5893.27 cw(c4601.73,5893.27) v1@4586.36,5908.64 ; v1(4580,5915) 4580,5885.87 4658.1,5807.77 4658.1,5711.9 4675,5695 4770.87,5695 4780.43,5685.43 R12.2@4780.43,5590 R12.2@4780.43,5580 ; 4713.71,5695 cw(c4713.71,5618.71) 4767.66,5672.66 cw(c4736.81,5641.81) 4780.43,5641.81 ; R12.2@4767.27,5607.1 ccw(c4735.48,5638.89) 4780.43,5638.89 ccw(c4825.39,5638.89) R12.2@4793.6,5607.1 ; 4767.66,5707.34 cw(c4737.86,5737.14) 4737.86,5695 cw(c4737.86,5642.86) 4774.73,5679.73 ; 4780.43,5619.76 cw(c4855.24,5619.76) 4802.34,5672.66 ; 4780.43,5643.9 cw(c4831.1,5643.9) 4795.27,5679.73
  Bottom Layer w20: 4780.43,5685.43 4785,5690
TWI5_1: "SDA MUX/DEMUX.5" "TWI_OnBoard Sensor.2" R13.2 | length 1156.8
  Top Layer w10: v1(5439.49,5610) 5439.49,5614.49 v1@5440,5615
  Bottom Layer w10: 4867.66,5672.66 cw(c4826.83,5631.83) 4884.57,5631.83 ; R13.2@4871.4,5607.1 ccw(c4839.61,5638.89) 4884.57,5638.89 ccw(c4929.52,5638.89) R13.2@4897.73,5607.1 ; 4874.73,5679.73 cw(c4850.97,5655.97) 4884.57,5655.97 ; R13.2@4884.57,5580 4884.57,5689.57 ; 4884.57,5629.74 cw(c4945.26,5629.74) 4902.34,5672.66 cw(c4913.07,5661.93) 4913.07,5677.1 ; 4884.57,5653.88 cw(c4921.12,5653.88) 4895.27,5679.73 ; 4885,5690 4897.9,5677.1 5151.66,5677.1 5218.76,5610 5435,5610 v1@5440,5615 ; 4888.2,5693.2 ccw(c4927.07,5732.07) 4927.07,5677.1 ; 4895.27,5700.27 ccw(c4951.22,5756.22) 4951.22,5677.1 ; 4902.34,5707.34 ccw(c4975.36,5780.36) 4975.36,5677.1 ; v1@5433.12,5603.64 ccw(c5417.76,5588.27) 5417.76,5610 ccw(c5417.76,5631.73) v1@5433.12,5616.36
  Bottom Layer w20: 4884.57,5689.57 4885,5690
USBDM: Mini-USB.2 MiniUSB.2 R17.1 U2.16 | length 1076
  Top Layer w8: v1@3567.93,5717.93 cw(c3550.86,5700.86) 3575,5700.86 cw(c3599.14,5700.86) v1@3582.07,5717.93 ; v1(3575,5725) 3575,5420 3585,5410 3734.57,5410 MiniUSB.2@3738.07,5413.5 ; 3672.2,5410 ccw(c3672.2,5436.07) MiniUSB.2@3690.63,5417.64
  Top Layer w10: R17.1@5130.43,6692.44 cw(c5130.43,6637.98) 5168.94,6676.49 ; R17.1@5130.43,6702.44 cw(c5130.43,6672.12) R17.1@5151.87,6693.56 ; R17.1@5130.43,6715 5175,6670.43 5175,6550 5181.5,6543.5 Mini-USB.2@5210,6543.5 ; R17.1@5149.06,6711.06 ccw(c5184.51,6711.06) 5159.44,6685.99 ; Mini-USB.2@5206.34,6540.08 ccw(c5198.07,6531.81) 5198.07,6543.5 ccw(c5198.07,6555.19) Mini-USB.2@5206.34,6546.93
  Bottom Layer w8: U2.16@3430.83,5720.75 3570.75,5720.75 v1(3575,5725) ; U2.16@3467.32,5718.7 cw(c3472.25,5713.77) 3472.25,5720.75 cw(c3472.25,5727.72) U2.16@3467.32,5722.79 ; 3540.59,5720.75 ccw(c3540.59,5759.41) v1@3567.93,5732.07 ; 3559.91,5720.75 ccw(c3559.91,5740.09) v1@3573.59,5726.41 ; 3561.12,5720.75 cw(c3561.12,5711.12) v1@3567.93,5717.93
USBDP: Mini-USB.3 MiniUSB.3 R16.1 U2.15 | length 2088.5
  Top Layer w8: MiniUSB.3@3690.63,5440.87 ccw(c3680.66,5430.9) 3680.66,5445 ccw(c3680.66,5459.1) MiniUSB.3@3690.63,5449.13 ; MiniUSB.3@3738.07,5445 3630,5445 3610,5465 3610,5660 3640,5690 3840,5690 v1(3945,5750) ; v1@3935.35,5752.63 cw(c3912.06,5758.98) 3924.04,5738.02 cw(c3936.02,5717.06) v1@3942.37,5740.35
  Top Layer w10: R16.1@5125.43,6465 5315,6465 5350,6430 5400,6430 5435,6465 5435,6545 5405,6575 Mini-USB.3@5275,6575 ; R16.1@5138.6,6451.83 cw(c5170.39,6420.04) 5170.39,6465 cw(c5170.39,6509.96) R16.1@5138.6,6478.17 ; Mini-USB.3@5299.8,6571.58 cw(c5308.07,6563.31) 5308.07,6575 cw(c5308.07,6586.69) Mini-USB.3@5299.8,6578.42
  Bottom Layer w8: U2.15@3428.78,5748.38 ccw(c3423.85,5753.31) 3430.83,5753.31 ccw(c3437.8,5753.31) U2.15@3432.87,5748.38 ; U2.15@3430.83,5746.34 3430.83,5788.73 3445,5802.9 3927.1,5802.9 3945,5785 v1(3945,5750) ; v1@3937.93,5757.07 ccw(c3920.86,5774.14) 3945,5774.14 ccw(c3969.14,5774.14) v1@3952.07,5757.07
VBUS: C14.1 C15.1 Ferrite.2@5054.57,6550 U1.52 | length 934.6
  Top Layer w10: C14.1@4885,6626.54 C15.1@4970,6626.54 4978.03,6626.54 Ferrite.2@5054.57,6550 4975,6550 4938.58,6513.58 U1.52@4938.58,6338.5 ; C14.1@4903.5,6611.98 cw(c4938.65,6576.83) 4938.65,6626.54 cw(c4938.65,6676.25) C14.1@4903.5,6641.1 ; C15.1@4951.5,6611.98 ccw(c4916.35,6576.83) 4916.35,6626.54 ccw(c4916.35,6676.25) C15.1@4951.5,6641.1 ; C15.1@4973.94,6605.94 cw(c4973.94,6546.35) 5016.08,6588.49 ; C15.1@4973.94,6615.94 cw(c4973.94,6580.49) C15.1@4999.01,6605.56 ; C15.1@4994.53,6626.54 ccw(c5034.35,6626.54) 5006.19,6598.37 ; 5016.06,6588.51 ccw(c5054.57,6627.02) Ferrite.2@5054.57,6572.56 ; 5025.56,6579.01 cw(c5000.49,6553.94) Ferrite.2@5035.94,6553.94 ; Ferrite.2@5033.13,6571.44 ccw(c5054.57,6592.88) Ferrite.2@5054.57,6562.56 ; Ferrite.2@5041.4,6536.83 ccw(c5009.61,6505.04) 5009.61,6550 ccw(c5009.61,6594.96) Ferrite.2@5041.4,6563.17
VIN: "3.3V Power Source.3" "3.3V Power Source.4" Battery.2 C2.2@4371.54,6645 | length 582.4
  Top Layer w20: 4330,6627.36 4380,6627.36 4380,6725 ; Battery.2@4350,6755 4380,6725 ; Battery.2@4351.51,6735.53 cw(c4354.32,6699.32) 4380,6725 ; Battery.2@4369.47,6753.49 ccw(c4405.68,6750.68) 4380,6725
  Bottom Layer w20: Battery.2@4336.19,6741.19 cw(c4302.86,6707.86) 4350,6707.86 cw(c4397.14,6707.86) Battery.2@4363.81,6741.19 ; 4350,6690.28 ccw(c4412.88,6690.28) C2.2@4368.42,6645.82 ; Battery.2@4350,6738.57 ccw(c4461.17,6738.57) C2.2@4382.56,6659.96 ; Battery.2@4350,6755 4350,6666.54 C2.2@4371.54,6645
pads on no net: Accel.1 Accel.6 Accel.11 Accel.12 Gyro.1 Gyro.2 Gyro.3 Gyro.4 Gyro.5 Gyro.14 Gyro.15 Gyro.16 Gyro.17 Gyro.19 Gyro.21 Gyro.22 MAG.3 MAG.5 MAG.6 MAG.7 MAG.14 Mini-USB.NC MiniUSB.4 MiniUSB.NC U1.1@2939.65,5450.24 U1.2@2939.65,5418.74 U1.9@2994.76,5174.65 U1.10@3026.26,5174.65 U1.11@3057.76,5174.65 U1.12@3089.25,5174.65 U1.13@3120.75,5174.65 U1.19@3270.35,5292.76 U1.22@3270.35,5387.24 U1.25@3215.24,5505.35 U1.26@3183.74,5505.35 U1.27@3152.24,5505.35 U1.28@3120.75,5505.35 U1.32@2994.76,5505.35 U2.2 U2.3 U2.6 U2.8 U2.9 U2.10 U2.11 U2.12 U2.13 U2.14 U2.22 U2.23 U2.24 U2.27 U2.28
copper on no net:
  other v2: 3848.31,5358.39 3848.31,5531.61 5363.31,6488.39 5363.31,6661.61

## Polygon pours and split planes (outlines as drawn)
GND on Top Layer "Top Layer-GND" (solid, pour order 2): 4045,6840 5595,6840 5595,5290 4045,5290
GND on Top Layer "Top Layer-GND" (solid, pour order 8): 2095,4320 2095,4870 3095,4870 3095,4320
GND on Top Layer "Top Layer-No Net" (solid, pour order 9): 2095,5845 4045,5845 4045,4895 2095,4895
GND on Top Layer "Top Layer-GND" (solid, pour order 12): 2094.69,6839.11 3194.69,6839.11 3194.69,5889.11 2094.69,5889.11
GND on Bottom Layer "Bottom Layer-GND" (solid, pour order 6): 4045,6840 5595,6840 5595,5290 4045,5290
GND on Bottom Layer "Bottom Layer-GND" (solid, pour order 10): 2095,4320 2095,4870 3095,4870 3095,4320
GND on Bottom Layer "bottom" (solid, pour order 11): 2095,5845 4045,5845 4045,4895 2095,4895
GND on Bottom Layer "Bottom Layer-No Net" (solid, pour order 7): 2094.69,6844.11 2099.69,6839.11 3194.69,6839.11 3194.69,5889.11 2094.69,5889.11

## Keep-outs
Keep-Out Layer:
  lines w8: 2119.69,5914.11 2119.69,6814.11 4019.69,6814.11 4019.69,5914.11 2119.69,5914.11
  lines w10: 2120,4345 2120,4845 3070,4845 3070,4345 2120,4345 ; 2120,4920 4020,4920 4020,5820 2120,5820 2120,4920 ; 4070,5315 5570,5315 5570,6815 4070,6815 4070,5315

## Silkscreen, mask and mechanical layers (free items; w line width, h text height)
Top Overlay:
  lines w8: 2245,4680 2290,4680 2290,4725 ; 2535,4720 2535,4670 2580,4670 ; 2895,4715 2950,4715 2950,4660
  text "-" at 4220,6785 h60
  text "-" at 4480,6780 h60
  text "+" at 4090,6775 h60
  text "+" at 4310,6770 h60
  text "-" at 4220,6700 h60
  text "+" at 4090,6690 h60
  text "-" at 4220,6600 h60
  text "+" at 4090,6590 h60
  text "-" at 2132.58,6513.69 h60
  text "+" at 2375.32,6511.47 h60
  text "+" at 4090,6495 h60
  text "-" at 4225,6495 h60
  text "-" at 4745,6440 h60
  text "+" at 4880,6435 h60
  text "-" at 4225,6395 h60
  text "+" at 4090,6390 h60
  text "-" at 5535,5945 h60
  text "+" at 5360,5935 h60
  text "SDA" at 4905,5750 h60 r90
  text "SCL" at 4625,5680 h60
  text "-" at 2130,5515 h60
  text "+" at 2370,5515 h60
  text "SDA" at 5025,5470 h60
  text "-" at 2405,5395 h60
  text "SCL" at 5040,5325 h60
  text "+" at 2395,5150 h60
  text "X" at 2895,4730 h20 r90
  text "x" at 2280,4720 h20 r90
  text "-" at 3000,4715 h60 r90
  text "SCL" at 2200,4710 h60 r90
  text "Y" at 2530,4705 h20 r90
  text "Y" at 2260,4690 h20 r90
  text "X" at 2580,4650 h20 r90
  text "Y" at 2955,4640 h20 r90
  text "+" at 3010,4465 h60 r90
  text "SDA" at 2210,4380 h60 r90
Bottom Overlay:
  text "3D Mouse Main Board v.1.1" at 5545,6715 h60
  text "11/06/2011" at 4095,5325 h60 r270
  text "Designed by Jianer Shi and Borui Chen" at 4155,5325 h60 r270
  text "Receiver Board v1.0" at 3940,5055 h60
  text "11/05/2011" at 3945,4985 h60
  text "Designed by Jianer Shi and Borui Chen" at 3940,4935 h60
  text "Designed by Jianer Shi and Borui Chen" at 2130,4835 h60 r180
  text "11/05/2011" at 2130,4445 h60 r180
  text "Fingerboard v1.0" at 2130,4390 h60 r180
Mechanical 4:
  lines w10: 2119.69,5914.11 4019.69,5914.11 4019.69,6814.11 2119.69,6814.11 2119.69,5914.11 ; 2120,4345 2120,4845 3070,4845 3070,4345 2120,4345 ; 2120,4920 4020,4920 4020,5820 2120,5820 2120,4920 ; 4070,5315 5570,5315 5570,6815 4070,6815 4070,5315
Drill Drawing:
  text ".LEGEND" at 4224.69,3844.11 h60
  text "Drill Drawing." at 4224.69,3744.11 h60

## Dimensions
4070,5315 to 5570,5315 on Mechanical 1
4070,5315 to 4070,6815 on Mechanical 1
3070,4345 to 3070,4845 on Mechanical 1
2120,4345 to 3070,4345 on Mechanical 1
2120,4920 to 4020,4920 on Mechanical 1
2120,4920 to 2120,5820 on Mechanical 1
2119.69,5914.11 to 2119.69,6814.11 on Mechanical 1
2119.69,5914.11 to 4019.69,5914.11 on Mechanical 1

## Text inside footprints (layer, text, board x,y; h text height)
2.4G: Top Overlay "2" at 5425,5820 h50 r90; Top Overlay "1" at 5525,5840 h50 r90; Top Overlay "7" at 5525,6280 h50 r90; Top Overlay "8" at 5425,6280 h50 r90
FB_Power: Top Overlay "1" at 4250,6280 h50 r90; Top Overlay "2" at 4150,6260 h50 r90
FB_TWIs: Top Overlay "1" at 4490,5360 h50; Top Overlay "2" at 4470,5460 h50
ISP: Top Overlay "6" at 2495,5435 h50 r90; Top Overlay "5" at 2595,5435 h50 r90; Top Overlay "2" at 2495,5075 h50 r90; Top Overlay "1" at 2595,5095 h50 r90
P1: Top Overlay "8" at 2289.69,6164.11 h50 r270; Top Overlay "7" at 2189.69,6164.11 h50 r270; Top Overlay "1" at 2189.69,6604.11 h50 r270; Top Overlay "2" at 2289.69,6624.11 h50 r270
RF: Top Overlay "2" at 2290,5630 h50 r270; Top Overlay "1" at 2190,5610 h50 r270; Top Overlay "7" at 2190,5170 h50 r270; Top Overlay "8" at 2290,5170 h50 r270